# Altium PCB SIWA_PCB.PcbDoc
Units mm, origin at the board's own origin, x right, y up, seen from the top; angles counter-clockwise.
Board outline 100.33 x 80.01 mm, 2 copper layers (Top Layer, Bottom Layer); 53 components, 61 nets, 227 pads, 0 vias.
Unrouted connection lines stored in the file: 119.
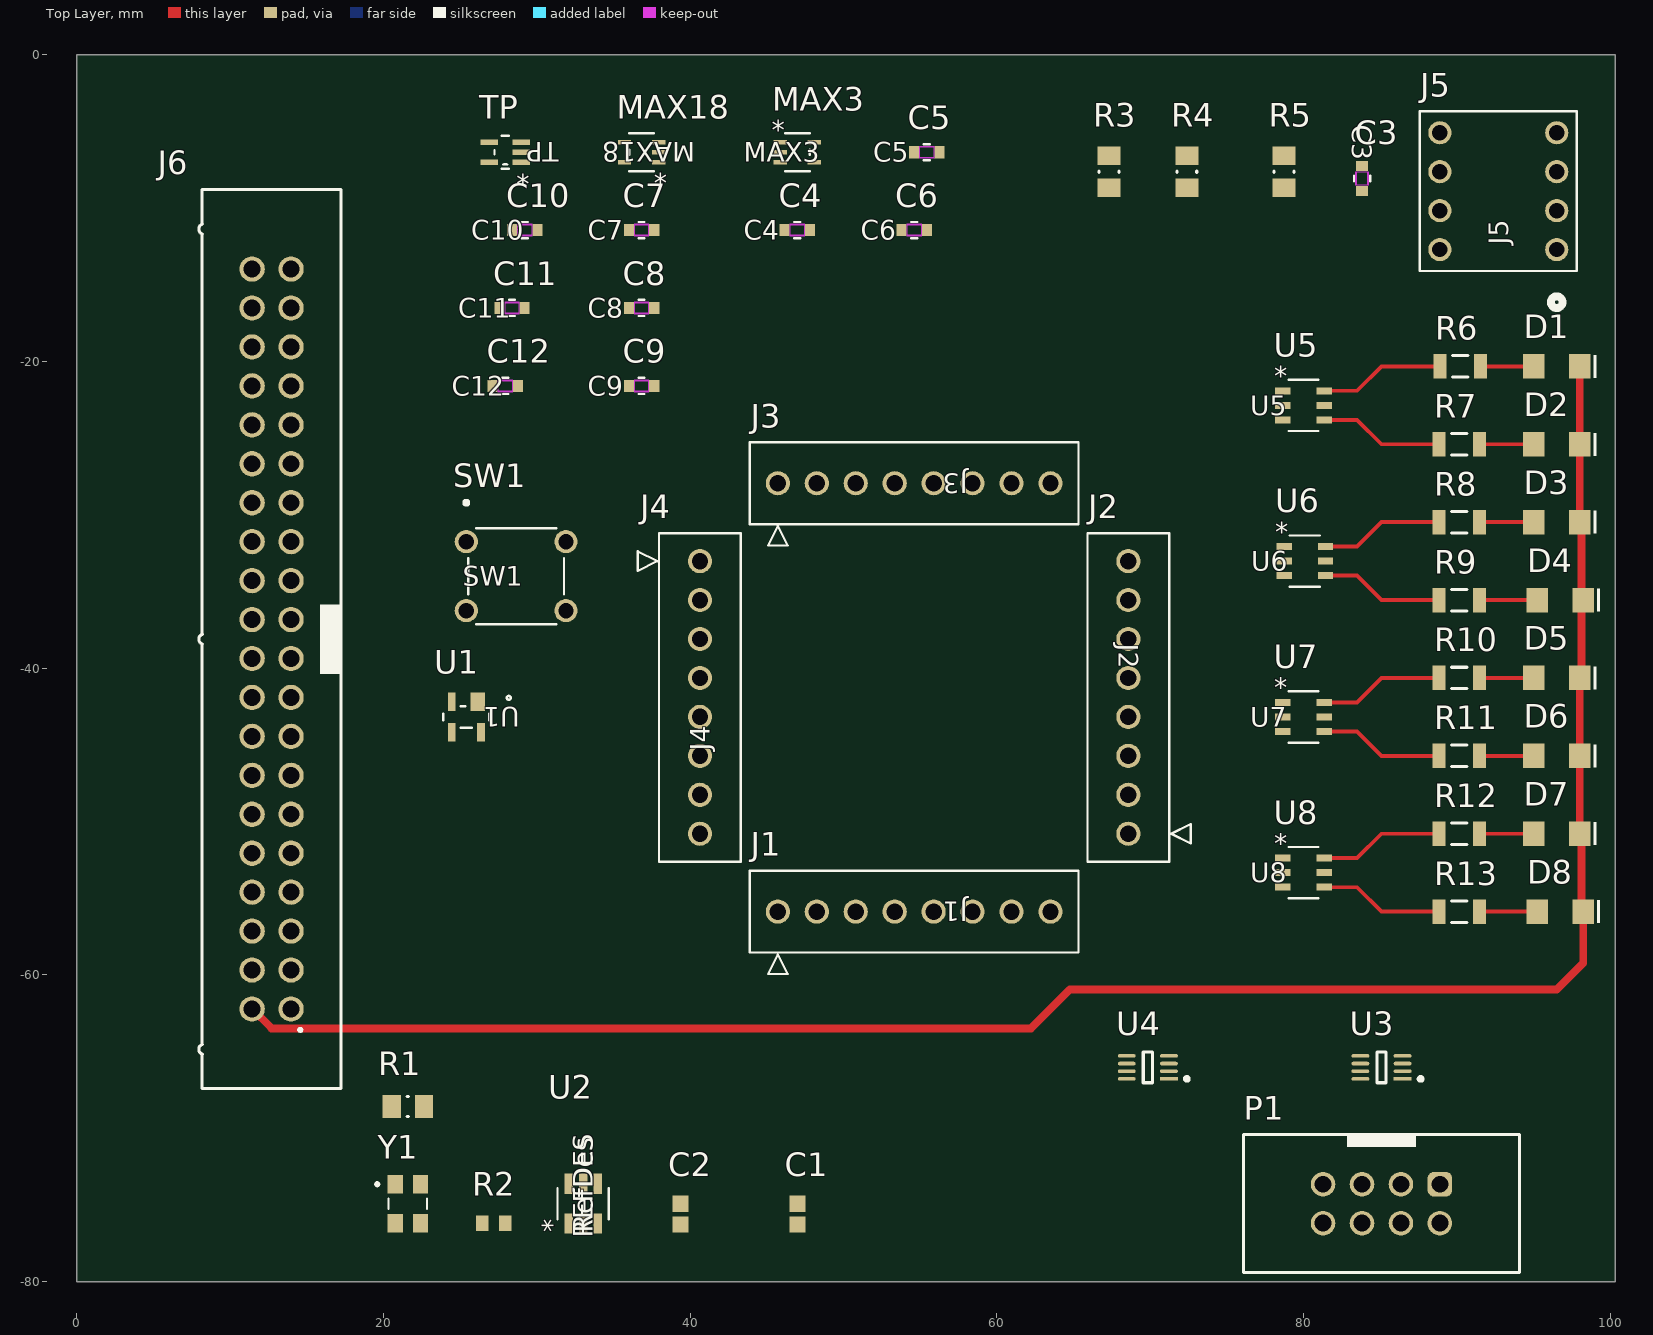
[diagram p0: Top Layer view]
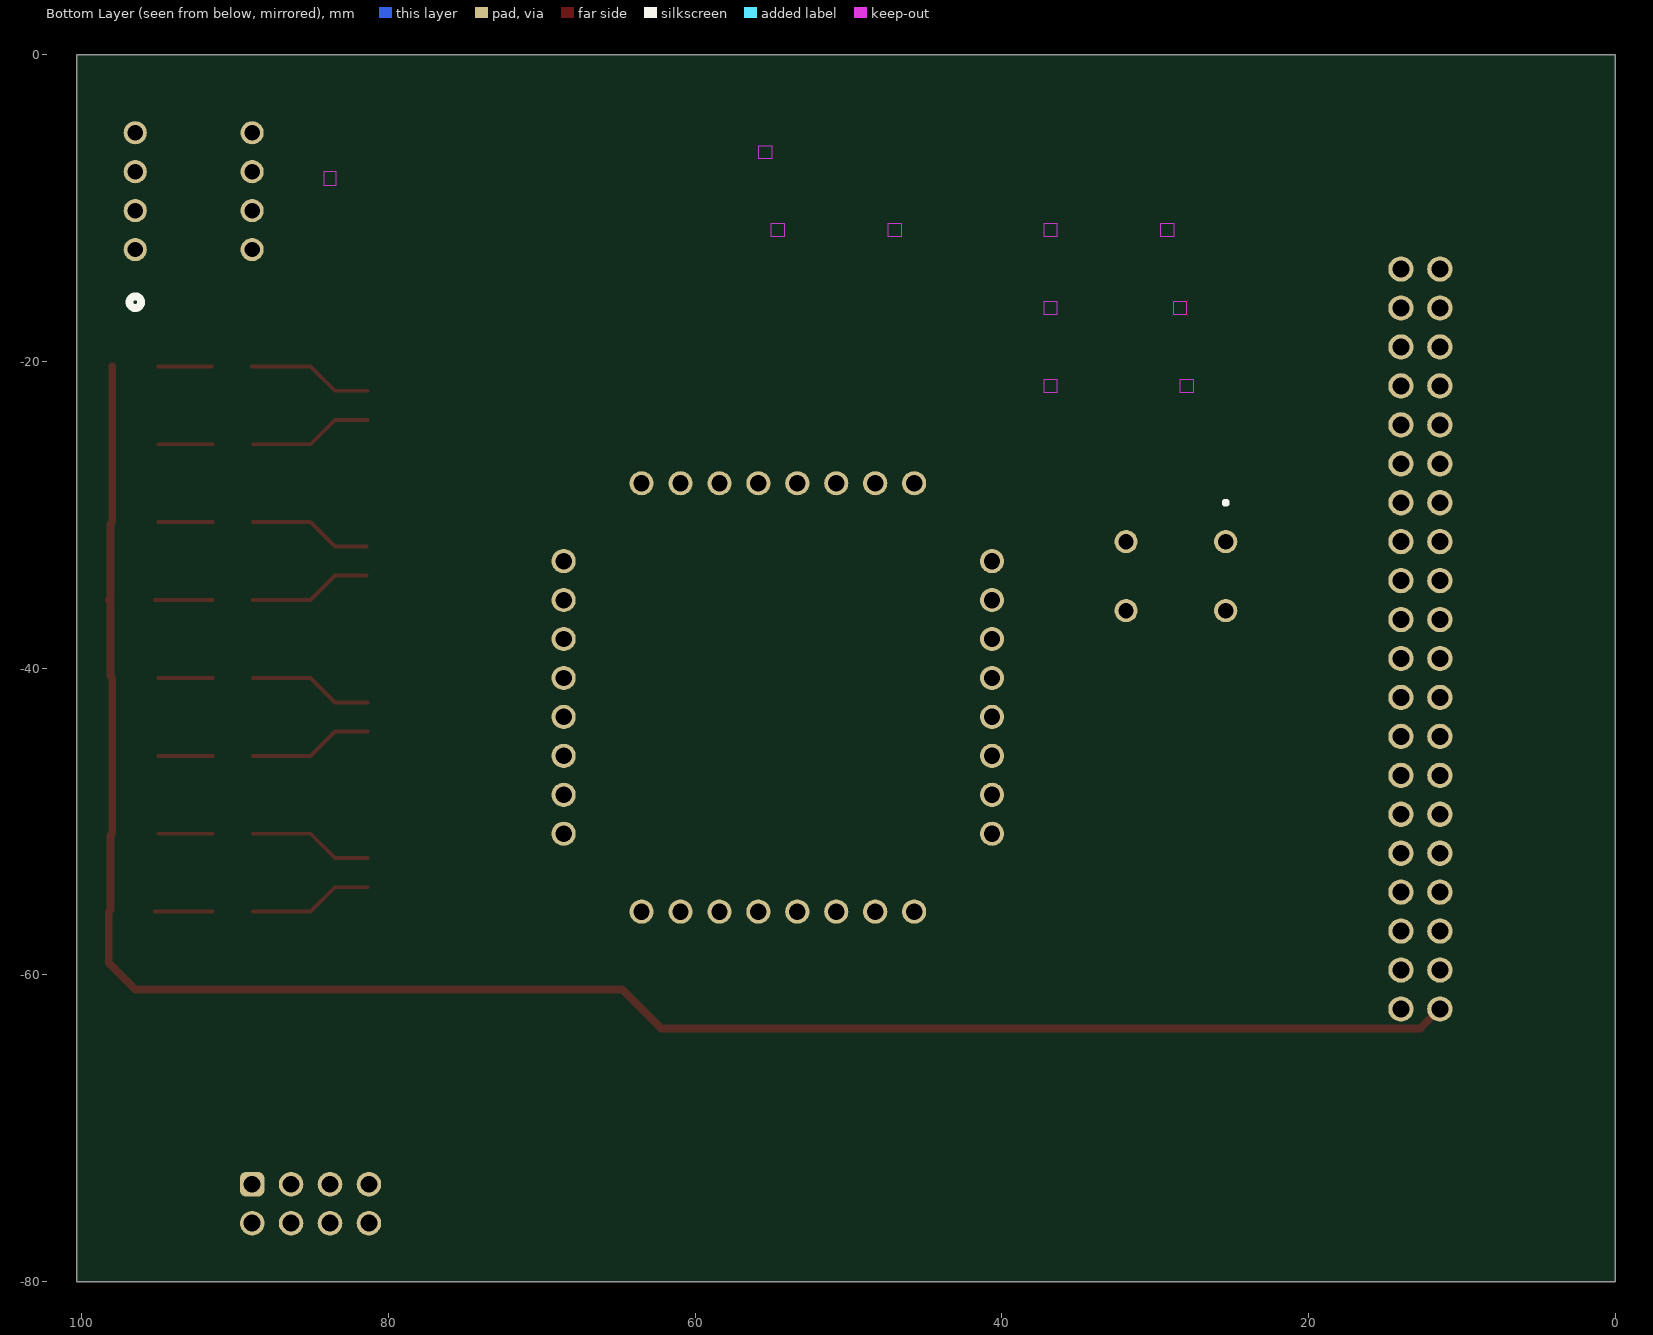
[diagram p1: Bottom Layer view, seen from below]

## Layer stack, top to bottom
Top Solder: solder mask 0.0102, Solder Resist, Dk 3.5
Top Layer: signal copper 0.0356
Dielectric 1: dielectric 0.32, FR-4, Dk 4.8
Bottom Layer: signal copper 0.0356
Bottom Solder: solder mask 0.0102, Solder Resist, Dk 3.5

## Board outline
0,-80.01 100.33,-80.01 100.33,0 0,0

## Design rules (kind name [scope] priority, off if disabled: settings)
Clearance Clearance_1 [All] p1: gap=0.15 ignorepadtopadclearanceinfootprint=FALSE
PolygonConnect [All] p1: connectstyle=Relief reliefconductorwidth=0.254 reliefentries=4 polygonreliefangle="90 Angle" airgapwidth=0.254
RoutingVias [All] p1: holewidth=0.711 width=1.27 viastyle="Through Hole" minholewidth=0.711 minwidth=1.27 maxholewidth=0.711 maxwidth=1.27
SolderMaskExpansion [All] p1: expansion=0 istentingtop=FALSE
SupplyNets "Schematic Supply Nets" [InNet('GND')] p1: voltage=0.000
Width Width_7 [InNet('Vin_in')] p1: maxlimit=0.5 minlimit=0.254 preferedwidth=0.5
Width Width_6 [InNet('VDD_+3.3V')] p2: maxlimit=0.5 minlimit=0.254 preferedwidth=0.5
Width Width_5 [InNet('VCC')] p3: maxlimit=0.5 minlimit=0.254 preferedwidth=0.5
Width Width_4 [InNet('3V')] p4: maxlimit=0.5 minlimit=0.254 preferedwidth=0.5
Width Width_3 [InNet('1V')] p5: maxlimit=0.5 minlimit=0.254 preferedwidth=0.5
Width Width_2 [InNet('1.8V')] p6: maxlimit=0.5 minlimit=0.254 preferedwidth=0.5
Width Width_1 [InNet('GND')] p7: maxlimit=0.5 minlimit=0.254 preferedwidth=0.5
Width [All] p8: maxlimit=0.254 minlimit=0.254 preferedwidth=0.254
30 further rules are at their usual default settings.

## Classes and differential pairs
component class U_SPI: C3 J5 R3 R4 R5
component class U_Reset: SW1 U1
component class U_Power: C4 C5 C6 C7 C8 C9 C10 C11 C12 MAX3 MAX18 TP
component class U_MONITOR: J6
component class U_LCD: D1 D2 D3 D4 D5 D6 D7 D8 P1 R6 R7 R8 R9 R10 R11 R12 R13 U3 U4 U5 U6 U7 U8
component class U_Header: J1 J2 J3 J4
component class U_CLOCK: C1 C2 R1 R2 U2 Y1

## Components (designator, comment, footprint, x,y, rotation, side; value= is the part's Value field where it differs from the comment)
C1 "Capacitor 0.1 uF" CAPC1608X90X40ML10T20 46.99,-75.605 r270 top value="0.1 uF"
C2 "Capacitor 0.1 uF" CAPC1608X90X40ML10T20 39.37,-75.605 r270 top value="0.1 uF"
C3 "CL10C120JB8NNNC" CAP_CL10_SAM 83.82,-8.062 r270 top
C4 "1uF" CAP_CL10_SAM 46.99,-11.43 r0 top
C5 "10nF" CAP_CL10_SAM 55.438,-6.35 r0 top
C6 "1uF" CAP_CL10_SAM 54.61,-11.43 r0 top
C7 "1uF" CAP_CL10_SAM 36.83,-11.43 r0 top
C8 "10nF" CAP_CL10_SAM 36.83,-16.51 r0 top
C9 "1uF" CAP_CL10_SAM 36.83,-21.59 r0 top
C10 "1uF" CAP_CL10_SAM 29.21,-11.43 r0 top
C11 "10nF" CAP_CL10_SAM 28.382,-16.51 r0 top
C12 "1uF" CAP_CL10_SAM 27.94,-21.59 r0 top
D1 "150120BS75000" WL-SMCW_1206_150120xx75000 96.52,-20.32 r180 top
D2 "150120BS75000" WL-SMCW_1206_150120xx75000 96.52,-25.4 r180 top
D3 "150120BS75000" WL-SMCW_1206_150120xx75000 96.52,-30.48 r180 top
D4 "150120BS75000" WL-SMCW_1206_150120xx75000 96.75,-35.56 r180 top
D5 "150120BS75000" WL-SMCW_1206_150120xx75000 96.52,-40.64 r180 top
D6 "150120BS75000" WL-SMCW_1206_150120xx75000 96.52,-45.72 r180 top
D7 "150120BS75000" WL-SMCW_1206_150120xx75000 96.52,-50.8 r180 top
D8 "150120BS75000" WL-SMCW_1206_150120xx75000 96.75,-55.88 r180 top
J1 "PPTC081LFBN-RC" CONN_PPTC081LFBN-RC_SUL 45.72,-55.88 r180 top
J2 "PPTC081LFBN-RC" CONN_PPTC081LFBN-RC_SUL 68.58,-50.8 r270 top
J3 "PPTC081LFBN-RC" CONN_PPTC081LFBN-RC_SUL 45.72,-27.94 r180 top
J4 "PPTC081LFBN-RC" CONN_PPTC081LFBN-RC_SUL 40.64,-33.02 r90 top
J5 "1-2199298-2" CONN8_1-2199298-2_TEC 96.52,-12.7 r90 top
J6 "6120XX21621_61204021621" 61204021621 12.7,-38.1 r90 top
MAX3 "MAX8510EXK30+T" 21-0076E_MXM 46.99,-6.35 r0 top
MAX18 "MAX8510EXK18+T" 21-0076E_MXM 36.83,-6.35 r180 top
P1 "61200821621" 61200821621 85.09,-74.93 r180 top
R1 "Resistor 10k +/-1% 0805 125 mW" RESC2013X50X35ML15T15 21.59,-68.58 r180 top value=10k
R2 "Resistor 50 +/-1% 0603 100 mW" RESC1608X55X25ML10T15 27.19,-76.2 r0 top value=50
R3 "Resistor 10k +/-1% 0805 125 mW" RESC2013X50X35ML15T15 67.31,-7.62 r90 top value=10k
R4 "Resistor 10k +/-1% 0805 125 mW" RESC2013X50X35ML15T15 72.39,-7.62 r90 top value=10k
R5 "Resistor 10k +/-1% 0805 125 mW" RESC2013X50X35ML15T15 78.74,-7.62 r90 top value=10k
R6 "RC1206FR-10750RL" RESC3116X65X40LL10T20 90.225,-20.32 r0 top
R7 "RC1206FR-10750RL" RESC3116X65X40LL10T20 90.17,-25.4 r0 top
R8 "RC1206FR-10750RL" RESC3116X65X40LL10T20 90.17,-30.48 r0 top
R9 "RC1206FR-10750RL" RESC3116X65X40LL10T20 90.17,-35.56 r0 top
R10 "RC1206FR-10750RL" RESC3116X65X40LL10T20 90.17,-40.64 r0 top
R11 "RC1206FR-10750RL" RESC3116X65X40LL10T20 90.17,-45.72 r0 top
R12 "RC1206FR-10750RL" RESC3116X65X40LL10T20 90.17,-50.8 r0 top
R13 "RC1206FR-10750RL" RESC3116X65X40LL10T20 90.17,-55.88 r0 top
SW1 "B3F-1000" SW_B3F-1000_OMR 25.4,-31.75 r0 top
TP "TPS71710DCKT" DCK5 27.94,-6.35 r180 top
U1 "APX811-31UG-7" APX811-31UG-7_DIO 25.4,-43.18 r180 top
U2 "PL133-37TI-R" SOT-23-6_MC_MCH 33.02,-74.93 r90 top
U3 "TCA9406DCUR" FP-DCU0008A-IPC_B 85.09,-66.04 r180 top
U4 "TCA9406DCUR" FP-DCU0008A-IPC_B 69.85,-66.04 r180 top
U5 "74LVC2G17GV,125" SC-74;TSOP6_NEX 80.01,-22.86 r0 top
U6 "74LVC2G17GV,125" SC-74;TSOP6_NEX 80.09,-33.02 r0 top
U7 "74LVC2G17GV,125" SC-74;TSOP6_NEX 80.01,-43.18 r0 top
U8 "74LVC2G17GV,125" SC-74;TSOP6_NEX 80.01,-53.34 r0 top
Y1 "ASE3-20.000MHZ-KT" XTAL_ASE3-20.000MHZ-KT 21.59,-74.93 r0 top

## Footprints (in the part's own frame and the unit in brackets; to place one, negate y for a bottom-side part, rotate by r counter-clockwise, add the part's x,y. Pads: shape width x height; smd on the part's side, far side on the other; paste and mask are expansions set on the pad)
21-0076E_MXM [mil]
  rect 34.5x12 smd paste+0 mask+0: 1(-43.75,25.59) 2(-43.75,0) 3(-43.75,-25.59) 4(43.75,-25.59) 5(43.75,25.59)
  silkscreen extent -32,-48 32,48, body extent -47,-44 47,44, height 43
61200821621 [mm] "8 pins, straight, gold plating"
  rrect50% 1.6x1.6 hole 1.1: 1(-3.81,-1.27)
  round 1.6 hole 1.1: 2(-3.81,1.27) 3(-1.27,-1.27) 4(-1.27,1.27) 5(1.27,-1.27) 6(1.27,1.27) 7(3.81,-1.27) 8(3.81,1.27)
  silkscreen extent -9.01,-4.5 9.01,4.5, body extent -8.91,-4.42 8.91,4.75, height 9.13
61204021621 [mm]
  round 1.65 hole 1.1: 1(-24.13,-1.27) 2(-24.13,1.27) 3(-21.59,-1.27) 4(-21.59,1.27) 5(-19.05,-1.27) 6(-19.05,1.27) 7(-16.51,-1.27) 8(-16.51,1.27) 9(-13.97,-1.27) 10(-13.97,1.27) 11(-11.43,-1.27) 12(-11.43,1.27) 13(-8.89,-1.27) 14(-8.89,1.27) 15(-6.35,-1.27) 16(-6.35,1.27) 17(-3.81,-1.27) 18(-3.81,1.27) 19(-1.27,-1.27) 20(-1.27,1.27) 21(1.27,-1.27) 22(1.27,1.27) 23(3.81,-1.27) 24(3.81,1.27) 25(6.35,-1.27) 26(6.35,1.27) 27(8.89,-1.27) 28(8.89,1.27) 29(11.43,-1.27) 30(11.43,1.27) 31(13.97,-1.27) 32(13.97,1.27) 33(16.51,-1.27) 34(16.51,1.27) 35(19.05,-1.27) 36(19.05,1.27) 37(21.59,-1.27) 38(21.59,1.27) 39(24.13,-1.27) 40(24.13,1.27)
  silkscreen extent -29.33,-4.52 29.33,4.74, body extent -29.23,-4.43 29.23,7.68, height 4.75
APX811-31UG-7_DIO [mil]
  rect 37x47.56 smd paste+0 mask+0: 1(-29,-39)
  rect 20x47.56 smd paste+0 mask+0: 2(37.5,-39) 3(37.5,39) 4(-37.5,39)
  silkscreen extent -114,-54 59,28, body extent -59,-49 59,49, height 39
CAP_CL10_SAM [mm]
  rect 0.656x0.8 smd paste+0 mask+0: 1(-0.828,0) 2(0.828,0)
  Top Layer keep-out region: -0.449,-0.349 -0.449,0.349 0.449,0.349 0.449,-0.349
  Keep-Out Layer region: -0.449,-0.4 -0.449,0.4 0.449,0.4 0.449,-0.4
  silkscreen extent -0.19,-0.53 0.19,0.53, body extent -0.8,-0.4 0.8,0.4, height 0.9
CAPC1608X90X40ML10T20 [mm] "Chip Capacitor, 2-Leads, Body 1.70x0.90mm, IPC Low Density"
  rect 1.05x1.05 smd: 1(-0.675,0) 2(0.675,0)
  body extent -0.85,-0.45 0.85,0.45, height 0.9
CONN8_1-2199298-2_TEC [mm]
  round 1.508 hole 1 paste-2539.97 mask+0: 1(0,0) 2(2.54,0) 3(5.08,0) 4(7.62,0) 5(0,7.62) 6(2.54,7.62) 7(5.08,7.62) 8(7.62,7.62)
  silkscreen extent -3.81,-1.32 9.02,8.94
CONN_PPTC081LFBN-RC_SUL [mil]
  round 62 hole 42 paste-99999 mask+0: 1(0,0) 2(-100,0) 3(-200,0) 4(-300,0) 5(-400,0) 6(-500,0) 7(-600,0) 8(-700,0)
  silkscreen extent -772,-105 72,160
DCK5 [mil]
  rect 46x14 smd paste-23 mask-23: 1(-41,25.59) 2(-41,0) 3(-41,-25.59) 4(41,-25.59) 5(41,25.59)
  silkscreen extent -9,-42 28,42, body extent -47,-43 47,43, height 43
FP-DCU0008A-IPC_B [mm]
  rect 1.16x0.237 smd paste+0 mask+0: 1(-1.376,0.75)
  rrect100% 1.16x0.237 smd paste+0 mask+0: 2(-1.376,0.25) 3(-1.376,-0.25) 4(-1.376,-0.75) 5(1.376,-0.75) 6(1.376,-0.25) 7(1.376,0.25) 8(1.376,0.75)
  silkscreen extent -2.68,-1 0.3,1, body extent -2.21,-1.25 2.21,1.25, height 0.25
RESC1608X55X25ML10T15 [mm] "Chip Resistor, 2-Leads, Body 1.70x0.90mm, IPC Low Density"
  rect 0.8x1 smd: 1(-0.75,0) 2(0.75,0)
  body extent -0.85,-0.45 0.85,0.45, height 0.55
RESC2013X50X35ML15T15 [mm] "Chip Resistor, 2-Leads, Body 2.2x1.4mm, IPC Low Density"
  rect 1.2x1.5 smd: 1(-1.05,0) 2(1.05,0)
  silkscreen extent -0.05,-0.65 0.05,0.65, body extent -1.1,-0.7 1.1,0.7, height 0.5
RESC3116X65X40LL10T20 [mm] "Chip Resistor, 2-Leads, Body 3.10x1.60mm, IPC High Density"
  rect 0.85x1.6 smd: 1(-1.325,0) 2(1.325,0)
  silkscreen extent -0.5,-0.7 0.5,0.7, body extent -1.6,-0.85 1.6,0.85, height 0.65
SC-74;TSOP6_NEX [mm]
  rect 0.998x0.456 smd paste+0 mask+0: 1(-1.35,0.95) 2(-1.35,0) 3(-1.35,-0.95) 4(1.35,-0.95) 5(1.35,0) 6(1.35,0.95)
  silkscreen extent -0.98,-1.68 0.98,1.68, body extent -1.5,-1.55 1.5,1.55, height 1.09
SOT-23-6_MC_MCH [mil]
  rect 52x22 smd paste+0 mask+0: 1(-51,37.4) 2(-51,0) 3(-51,-37.4) 4(51,-37.4) 5(51,0) 6(51,37.4)
  silkscreen extent -41,-66 41,66, body extent -63,-61 63,61, height 57
SW_B3F-1000_OMR [mm]
  round 1.508 hole 1 paste-2539.97 mask+0: 1(0,0) 2(6.5,0) 3(0,-4.5) 4(6.5,-4.5)
  silkscreen extent -0.13,-5.38 6.38,2.67
WL-SMCW_1206_150120xx75000 [mm] "SMD Mono-color Chip LED, body 3.2x1.6mm"
  rect 1.4x1.6 smd: 1(-1.5,0) 2(1.5,0)
  silkscreen extent -2.6,-0.75 -2.4,0.75, body extent -1.6,-0.8 1.6,0.8, height 0.68
XTAL_ASE3-20.000MHZ-KT [mm]
  rect 1x1.2 smd: 1(-0.825,1.27) 2(-0.825,-1.27) 3(0.825,-1.27) 4(0.825,1.27)
  silkscreen extent -2.1,-0.35 1.25,1.37

## Part data
C1 C2: library part CMP-001-00014-6, "Chip Capacitor, 0.1 uF 0603", Capacitor Type=Ceramic, Case/Package=0603, Max Operating Temperature=125°C, Min Operating Temperature=-55°C, Tolerance=5%, Voltage Rating=50V, Mounting Technology=SM, Pins=2, RoHS Compliant=True
C3: "No Description Available", Manufacturer_Name=Samsung, Copyright="Copyright (C) 2026 Ultra Librarian. All rights reserved.", Manufacturer_Part_Number=CL10C120JB8NNNC
C4 C5 C6 C7 C8 C9 C10 C11 C12: library part CL10C120JB8NNNC, "No Description Available", Manufacturer_Name=Samsung, Copyright="Copyright (C) 2026 Ultra Librarian. All rights reserved.", Manufacturer_Part_Number=CL10C120JB8NNNC
D1 D2 D3 D4 D5 D6 D7 D8: library part CMP-1426-00015-4, "Wurth Elektronik LED, WL-SMCW, 3216 (1206), 470 nm, 3.2 x 1.6 x 0.68mm", Case Code (Imperial)=1206, Case Code (Metric)=3216, Color=Blue, Forward Current=100mA, Forward Voltage=3.2V, Manufacturer Lifecycle Status=ACTIVE, Manufacturer Package Identifier=LED_1206, Max Operating Temperature=85°C, Max Reverse Voltage (DC)=5V, Min Operating Temperature=-40°C, Test Current=20mA, Case/Package=1206, Dominant Wavelength=470nm, Height=680µm, Length=3.2mm, Lens Style="Clear, Rectangular", Lifecycle Status=Production, Luminous Intensity=145mcd, Mount="Surface Mount", Packaging="Tape and Reel", Peak Wavelength=465nm, REACH SVHC=Unknown, RoHS=Compliant, Viewing Angle=140°, Wavelength=470nm, Width=1.6mm, YEOL="1 = Estimated lifetime > 10 years"
J1 J2 J3 J4: "Description", Manufacturer_Name=Sullins, Copyright="Copyright (C) 2026 Ultra Librarian. All rights reserved.", Manufacturer_Part_Number=PPTC081LFBN-RC, RefDes=RefDes, Type=Type
J5: "8P,DIP SKT,300 CL,LDR,PB FREE", Manufacturer_Name="TE Connectivity", Copyright="Copyright (C) 2026 Ultra Librarian. All rights reserved.", Manufacturer_Part_Number=1-2199298-2, RefDes=RefDes, Type=DIP
J6: "Connector Header Through Hole 40 position 0.100 (2.54mm)", Package=None, Check_prices=https://www.snapeda.com/parts/61204021621/W%25C3%25BCrth+Elektronik+Midcom/view-part/?ref=eda, MF="WÃ¼rth Elektronik", MP=61204021621, SnapEDA_Link=https://www.snapeda.com/parts/61204021621/W%25C3%25BCrth+Elektronik+Midcom/view-part/?ref=snap
MAX3: "Ultra-Low-Noise, High PSRR, Low-Dropout, 120mA Linear Regulators", Manufacturer_Name="Analog Devices Inc", Copyright="Copyright (C) 2026 Ultra Librarian. All rights reserved.", Manufacturer_Part_Number=MAX8510EXK30+T, RefDes=RefDes, Type=Type
MAX18: library part MAX8510EXK30+T, "Ultra-Low-Noise, High PSRR, Low-Dropout, 120mA Linear Regulators", Manufacturer_Name="Analog Devices Inc", Copyright="Copyright (C) 2026 Ultra Librarian. All rights reserved.", Manufacturer_Part_Number=MAX8510EXK30+T, RefDes=RefDes, Type=Type
P1: library part CMP-1502-00006-3, "Wr-bhd; 2.54MM Pitch 8 Way 2 Row Shrouded Straight Pcb Header, Surface Mount", Color=Black, Contact Resistance=20mΩ, Current Rating=3A, Insulation Resistance=1GΩ, Max Operating Temperature=105°C, Min Operating Temperature=-40°C, Operating Supply Voltage=250V, Connector Type="Male Pin", Contact Material=Copper, Contact Plating=Gold, Gender=Male, Insulation Material=PBT, Lead Pitch=2.54mm, Length=17.82mm, Mount="Through Hole", Number of Contacts=8, Number of Pins=8, Number of Positions=8, Number of Rows=2, Orientation=Vertical, Pitch=2.54mm, RoHS=Compliant, Row Spacing=2.54mm, Termination=Solder
R1 R3 R4 R5: library part CMP-009-00018-5, "Chip Resistor, 10 KOhm, +/- 1%, 125 mW, -55 to 155 degC, 0805 (2012 Metric)", Case/Package=0805, Max Operating Temperature=155°C, Min Operating Temperature=-55°C, Power=125mW, Tolerance=1%, Voltage Rating=150V, Mounting Technology=SM, Pins=2, RoHS Compliant=True
R2: library part CMP-009-00017-5, "Chip Resistor, 50 Ohm 0603", Case/Package=0603, Max Operating Temperature=155°C, Min Operating Temperature=-55°C, Power=100mW, Tolerance=1%, Voltage Rating=50V, Mounting Technology=SM, Pins=2, RoHS Compliant=True
R6 R7 R8 R9 R10 R11 R12 R13: library part CMP-2003-04964-1, Manufacturer=Yageo, Part Number=RC1206FR-10750RL
SW1: "Description", Manufacturer_Name=Omron, Copyright="Copyright (C) 2026 Ultra Librarian. All rights reserved.", Manufacturer_Part_Number=B3F-1000, RefDes=RefDes, Type=Type
TP: "150-mA, high-PSRR, low-IQ, low-dropout voltage regulator with enable 5-SC70 -40 to 125", Manufacturer_Name="Texas Instruments", Copyright="Copyright (C) 2026 Ultra Librarian. All rights reserved.", Datasheet=https://www.ti.com/lit/gpn/tps717, Manufacturer_Part_Number=TPS71710DCKT, RefDes=RefDes, Type=Type
U1: "No Description Available", Manufacturer_Name="Diodes Inc", Copyright="Copyright (C) 2026 Ultra Librarian. All rights reserved.", Manufacturer_Part_Number=APX811-31UG-7, RefDes=RefDes, Type=Type
U2: "Description", Manufacturer_Name=Microchip, Copyright="Copyright (C) 2025 Ultra Librarian. All rights reserved.", Manufacturer_Part_Number=PL133-37TI-R, RefDes=RefDes, Type=Type
U3 U4: library part CMP-0314-00417-3, "IC TRNSLTR BIDIRECTIONAL US8", Case/Package=VSSOP, High Level Output Current=-50mA, Low Level Output Current=50mA, Max Operating Temperature=85°C, Max Supply Voltage=5.5V, Min Operating Temperature=-40°C, Min Supply Voltage=1.65V, Package Quantity=1, Contact Plating=Gold, Data Rate=24Mbps, Height=0.8mm, Lead Free="Lead Free", Length=2.1mm, Logic Function=Translator, Number of Bits=2, Number of Channels=2, Number of Outputs=2, Number of Pins=8, Output Type=Voltage, Packaging="Tape and Reel", Propagation Delay=4.4ns, Radiation Hardening=No, REACH SVHC="No SVHC", Turn-On Delay Time=260ns, Weight=0.00067oz, Width=2.4mm
U5 U6 U7 U8: "Description", Manufacturer_Name=Nexperia, Copyright="Copyright (C) 2026 Ultra Librarian. All rights reserved.", Manufacturer_Part_Number=74LVC2G17GV,125, RefDes=RefDes, Type=Logic
Y1: Package=None, Availability=Unavailable, MP=ASE3-20.000MHZ-KT, Price=None

## Nets (pads, with @x,y where several pads share a name; then routed paths per layer and width w, separated by ;. In a path a pad name is that pad's centre, name@x,y a point inside that pad or via, vN(x,y) a via of type N, cw(c..) or ccw(c..) an arc to the next point about the centre after c; other vN are vias at no path point)
1.8V: C1.1 C2.1 C3.2 J2.1 J2.2 J2.3 J2.4 J3.3 J3.4 J3.5 J3.6 J3.7 J3.8 J5.8 J6.6 R1.1 R3.1 R4.1 R5.1 U2.5 U3.3 U3.6 U4.3 U4.6 Y1.4
1V: J6.8
3V: J6.4 U1.4
GND: C1.2 C2.2 C3.1 C4.1 C5.1 C6.1 C7.1 C8.1 C9.1 C10.1 C11.1 C12.1 D1.1 D2.1 D3.1 D4.1 D5.1 D6.1 D7.1 D8.1 J2.5 J2.6 J5.4 J6.2 MAX3.2 MAX18.2 P1.1 SW1.3 SW1.4 TP.2 U1.1 U2.2 U3.2 U4.2 U5.2 U6.2 U7.2 U8.2 Y1.2 | length 128.3
  Top Layer w0.5: J6.2 12.7,-63.5 62.23,-63.5 64.77,-60.96 96.52,-60.96 98.25,-59.23 D8.1 98.135,-55.765 98.135,-50.915 D7.1 D6.1 D5.1 98.135,-40.525 98.135,-35.675 D4.1 98.135,-35.445 98.135,-30.595 D3.1 D2.1 D1.1
GPIO_PAD_0(13): J1.1 U3.4 U7.1
GPIO_PAD_1(10): J1.2 U3.5 U7.3
GPIO_PAD_2(8): J1.3 U4.4 U8.1
GPIO_PAD_3(5): J2.8 U4.5 U8.3
MISO: J4.1 J5.5 J6.34
MOSI: J4.2 J5.2 J6.28
NetC5_2: C5.2 MAX3.4
NetC6_2: C6.2 J6.3 MAX3.5
NetC8_2: C8.2 MAX18.4
NetC9_2: C9.2 J6.7 MAX18.5
NetC11_2: C11.2 TP.4
NetC12_2: C12.2 J6.5 TP.5
NetD1_2: D1.2 R6.2 | length 3.5
  Top Layer w0.254: R6.2 D1.2
NetD2_2: D2.2 R7.2 | length 3.5
  Top Layer w0.254: R7.2 D2.2
NetD3_2: D3.2 R8.2 | length 3.5
  Top Layer w0.254: R8.2 D3.2
NetD4_2: D4.2 R9.2 | length 3.8
  Top Layer w0.254: R9.2 D4.2
NetD5_2: D5.2 R10.2 | length 3.5
  Top Layer w0.254: R10.2 D5.2
NetD6_2: D6.2 R11.2 | length 3.5
  Top Layer w0.254: R11.2 D6.2
NetD7_2: D7.2 R12.2 | length 3.5
  Top Layer w0.254: R12.2 D7.2
NetD8_2: D8.2 R13.2 | length 3.8
  Top Layer w0.254: R13.2 D8.2
NetJ1_4: J1.4 U6.1
NetJ1_5: J1.5 U6.3
NetJ1_6: J1.6 U5.3
NetJ1_7: J1.7 U5.1
NetJ1_8: J1.8
NetJ2_7: J2.7 J6.10
NetJ4_3: J4.3
NetJ4_4: J4.4
NetJ4_5: J4.5
NetJ4_6: J4.6 J6.16
NetJ5_3: J5.3 R5.2
NetJ5_7: J5.7 R3.2
NetJ6_9: J6.9 U2.1
NetJ6_15: J6.15 U1.2
NetR1_2: R1.2 Y1.1
NetR2_1: R2.1 U2.3
NetR2_2: R2.2 Y1.3
NetR6_1: R6.1 U5.6 | length 8.2
  Top Layer w0.254: U5.6 83.5,-21.91 85.09,-20.32 R6.1
NetR7_1: R7.1 U5.4 | length 8.1
  Top Layer w0.254: U5.4 83.5,-23.81 85.09,-25.4 R7.1
NetR8_1: R8.1 U6.6 | length 8.1
  Top Layer w0.254: U6.6 83.5,-32.07 85.09,-30.48 R8.1
NetR9_1: R9.1 U6.4 | length 8.1
  Top Layer w0.254: U6.4 83.5,-33.97 85.09,-35.56 R9.1
NetR10_1: R10.1 U7.6 | length 8.1
  Top Layer w0.254: U7.6 83.5,-42.23 85.09,-40.64 R10.1
NetR11_1: R11.1 U7.4 | length 8.1
  Top Layer w0.254: U7.4 83.5,-44.13 85.09,-45.72 R11.1
NetR12_1: R12.1 U8.6 | length 8.1
  Top Layer w0.254: U8.6 83.5,-52.39 85.09,-50.8 R12.1
NetR13_1: R13.1 U8.4 | length 8.1
  Top Layer w0.254: U8.4 83.5,-54.29 85.09,-55.88 R13.1
NetSW1_1: SW1.1 SW1.2 U1.3
SCLB1: P1.5 U4.8
SCLB2: P1.7 U3.8
SCLK: J4.7 J5.1 J6.32 R4.2
SCS: J4.8 J5.6 J6.30
SDAB1: P1.6 U4.1
SDAB2: P1.4 U3.1
UART_RX: J3.1 J6.36
UART_TX: J3.2 J6.38
VCC: J6.14 U5.5 U6.5 U7.5 U8.5
VDD_+3.3V: J6.12 P1.2 P1.3 U3.7 U4.7
Vin_in: C4.2 C7.2 C10.2 J6.1 MAX3.1 MAX3.3 MAX18.1 MAX18.3 TP.1 TP.3
pads on no net: J6.11 J6.13 J6.17 J6.18 J6.19 J6.20 J6.21 J6.22 J6.23 J6.24 J6.25 J6.26 J6.27 J6.29 J6.31 J6.33 J6.35 J6.37 J6.39 J6.40 P1.8 U2.4 U2.6

## Silkscreen, mask and mechanical layers (free items; w line width, h text height)
Mechanical 1:
  the board outline again, w0.254

## Text inside footprints (layer, text, board x,y; h text height)
MAX3: Top Overlay "*" at 45.307,-5.522 h1.27; Mechanical 13 "*" at 46.253,-6.487 h1.27
MAX18: Top Overlay "*" at 38.513,-7.178 h1.27 r180; Mechanical 13 "*" at 37.567,-6.213 h1.27 r180
TP: Top Overlay "*" at 29.553,-7.229 h1.27 r180; Mechanical 13 "*" at 29.553,-7.229 h1.27 r180
U2: Top Overlay "RefDes" at 33.655,-76.835 h1.27 r90; Top Overlay "*" at 31.638,-76.797 h1.27 r90; Top Overlay "REFDES" at 33.655,-77.153 h1.27 r90; Mechanical 13 "RefDes2" at 33.655,-77.153 h1.27 r90; Mechanical 13 "*" at 32.817,-75.768 h1.27 r90
U5: Top Overlay "*" at 78.089,-21.581 h1.27; Mechanical 13 "*" at 79.223,-22.657 h1.27
U6: Top Overlay "*" at 78.168,-31.741 h1.27; Mechanical 13 "*" at 79.302,-32.817 h1.27
U7: Top Overlay "*" at 78.089,-41.901 h1.27; Mechanical 13 "*" at 79.223,-42.977 h1.27
U8: Top Overlay "*" at 78.089,-52.061 h1.27; Mechanical 13 "*" at 79.223,-53.137 h1.27